# EAGLE board usblirc_v2 (EAGLE 5.02)
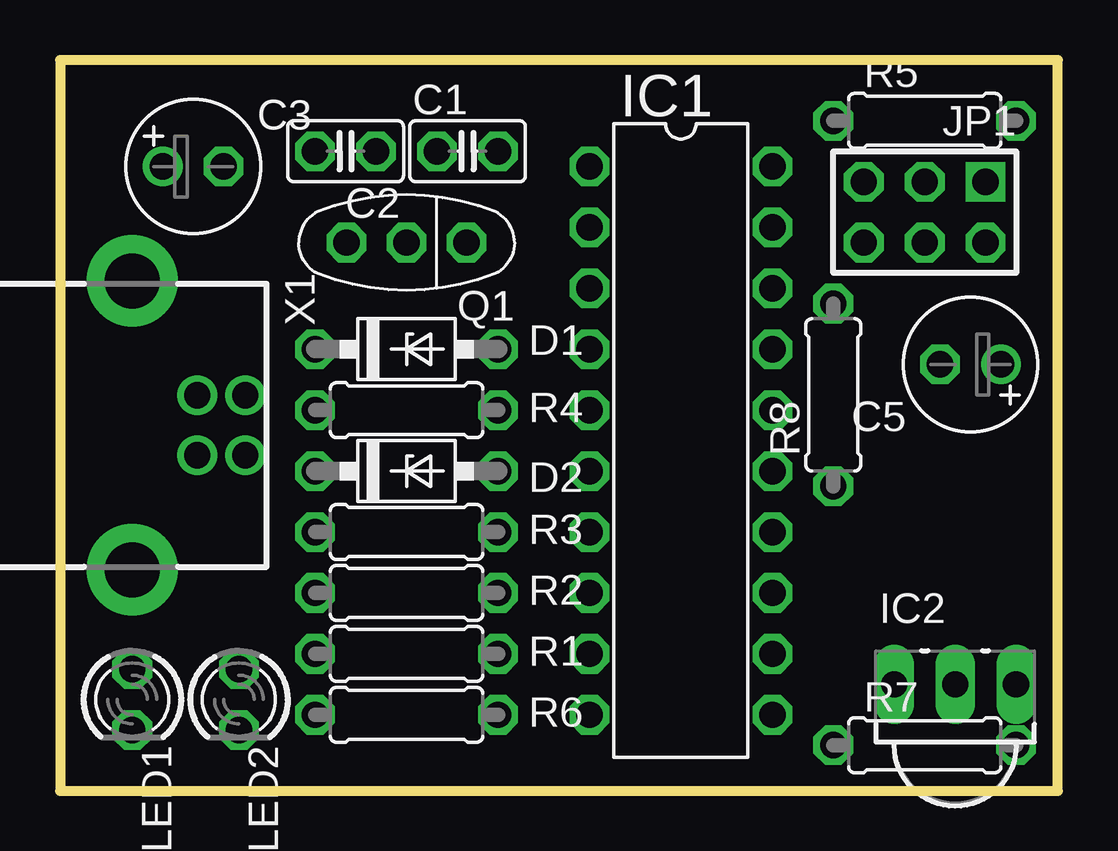
[diagram p0: board, top side]
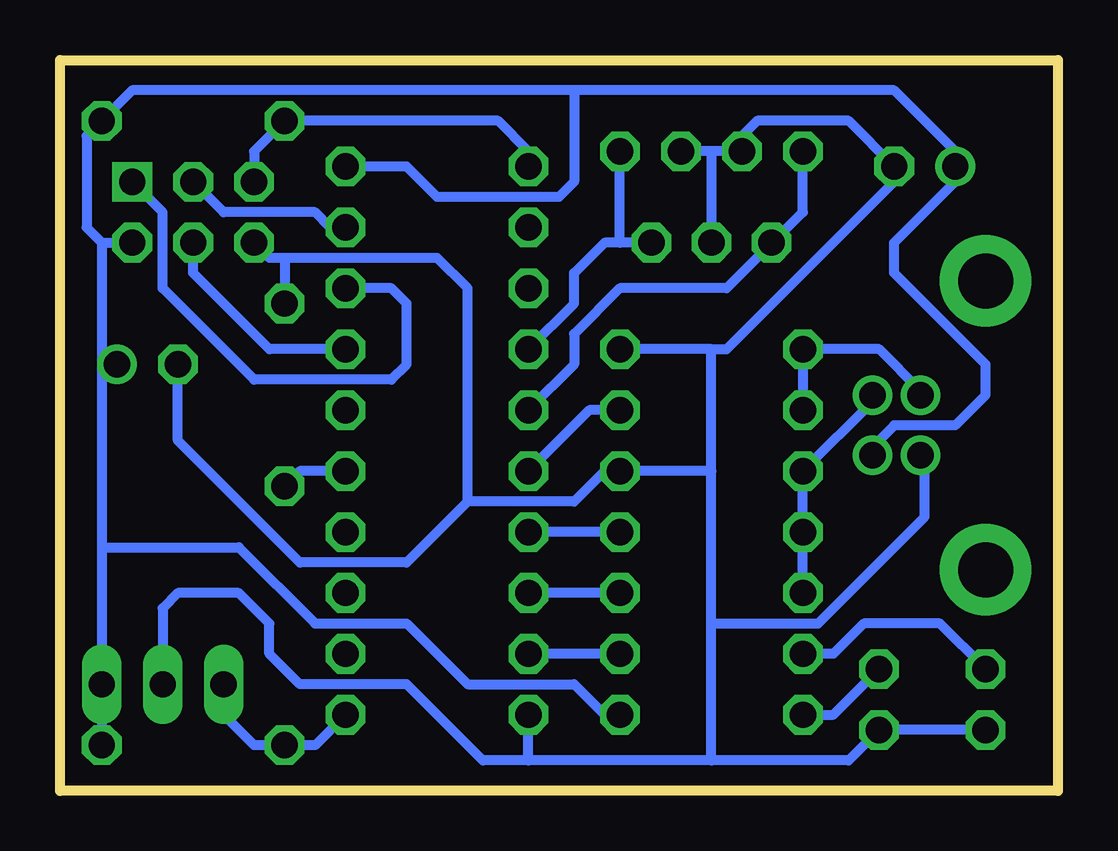
[diagram p1: board, bottom side, seen from below]

Size 41.58 x 30.47 mm. Coordinates in mm from the lower left corner, seen from the top.
Outline: 0,0 41.58,0 41.58,30.47 0,30.47 0,0
Copper layers (1*16): Top 0.035mm / dielectric 1.5mm / Bottom 0.035mm
Design rules "default": minimum track width 10mil, minimum drill 24mil, track to track 8mil, track to pad 8mil, pad to pad 8mil, via to via 8mil, smd to smd 8mil, copper to edge 40mil, drill to drill 8mil, minimum pad ring 10mil, minimum via ring 8mil, stop-mask expansion 4mil, vias tented up to drill 0mil, thermal gap 10mil

## Footprints (pad centres in the part's own frame; a part is rotated, then mirrored left to right if it is on the bottom)
C025-025X050 = drill 1.1 octagon: 1 -1.27,0; 2 1.27,0
E2,5-6 = drill 1.1 round: + -1.27,0 | drill 1.1 pad 1.6 octagon: - 1.27,0
DO41Z10 = drill 1.1 octagon: A 3.81,0; C -3.81,0
DIL20 = drill 1.1 octagon: 1 -11.43,-3.81; 2 -8.89,-3.81; 3 -6.35,-3.81; 4 -3.81,-3.81; 5 -1.27,-3.81; 6 1.27,-3.81; 7 3.81,-3.81; 8 6.35,-3.81; 9 8.89,-3.81; 10 11.43,-3.81; 11 11.43,3.81; 12 8.89,3.81; 13 6.35,3.81; 14 3.81,3.81; 15 1.27,3.81; 16 -1.27,3.81; 17 -3.81,3.81; 18 -6.35,3.81; 19 -8.89,3.81; 20 -11.43,3.81
PHSC38 = drill 1.1 long: 1 -2.54,0; 2 0,0; 3 2.54,0
AVR-ISP-6 = drill 1.1 square: 1 -2.54,-1.27 | drill 1.1 octagon: 2 -2.54,1.27; 3 0,-1.27; 4 0,1.27; 5 2.54,-1.27; 6 2.54,1.27
LED3MM = drill 1.1 octagon: A -1.27,0; K 1.27,0
CSTLS_G9 = drill 1.1 octagon: 1 -2.5,0; 2 0,0; 3 2.5,0
0207/7 = drill 1.1 octagon: 1 -3.81,0; 2 3.81,0
USB-B = drill 1.1 round: 1 1.25,4.71; 2 -1.25,4.71; 3 -1.25,2.71; 4 1.25,2.71 | drill 2.3 pad 3.81 round: S1 -6.02,0; S2 6.02,0

## Placement (x,y rotation side)
C1  [C025-025X050]  16.98,26.67 0 top
C2  [C025-025X050]  11.9,26.67 180 top
C3  100uF  [E2,5-6]  5.55,26.03 0 top
C5  47uF  [E2,5-6]  37.94,17.78 180 top
D1  1N4728  [DO41Z10]  14.44,18.41 0 top
D2  1N4728  [DO41Z10]  14.44,13.33 0 top
IC1  AT90S2313P  [DIL20]  25.87,14.6 270 top
IC2  PHSC38  [PHSC38]  37.3,4.44 0 top
JP1  AVR-ISP-6  [AVR-ISP-6]  36.03,24.12 180 top
LED1  [LED3MM]  3.01,3.81 270 top
LED2  [LED3MM]  7.46,3.81 270 top
Q1  [CSTLS_G9]  14.44,22.86 180 top
R1  1k  [0207/7]  14.44,5.71 180 top
R2  68  [0207/7]  14.44,8.25 180 top
R3  1k5  [0207/7]  14.44,10.79 180 top
R4  68  [0207/7]  14.44,15.87 180 top
R5  10k  [0207/7]  36.03,27.94 0 top
R6  1k  [0207/7]  14.44,3.17 0 top
R7  10k  [0207/7]  36.03,1.9 0 top
R8  22k  [0207/7]  32.22,16.51 90 top
X1  USB-BB  [USB-B]  3.01,15.23 270 top

## Library data of the parts
C1-C3 C5 D1 D2 IC1 IC2 JP1 LED1 LED2 Q1 R1-R8 X1 = USBtiny-Lirc

## Nets
+5V: C3.+ C5.+ IC1.20 IC2.3 JP1.2 R5.2 R6.2 R7.2 X1.1
GND: C1.1 C2.1 C3.- C5.- D1.A D2.A IC1.10 IC2.2 JP1.6 LED1.K LED2.K Q1.2 R8.2 X1.4
N$1: IC1.9 R1.1
N$2: LED1.A R1.2
N$3: C1.2 IC1.4 Q1.1
N$4: C2.2 IC1.5 Q1.3
N$5: IC1.19 JP1.3
N$6: D2.C R2.2 R3.2 X1.2
N$7: IC1.8 R2.1
N$8: IC1.7 R3.1
N$9: D1.C R4.2 X1.3
N$10: IC1.6 R4.1
N$11: IC1.18 JP1.1
N$12: IC1.1 JP1.5 R5.1
N$13: IC1.17 JP1.4
N$14: LED2.A R6.1
N$17: IC1.11 IC2.1 R7.1
N$21: IC1.15 R8.1

## Tracks (layer width: path | path; a pad name or v marks a point on that pad's centre or on a via)
+5V
  Bottom 0.406: 20.15,29.21 38.57,29.21 R5.2 40.48,27.3 40.48,23.49 39.84,22.86 | 20.15,29.21 6.82,29.21 4.28,26.67 C3.+ 4.28,25.39 6.82,22.86 6.82,21.59 3.01,17.78 3.01,16.51 4.28,15.23 6.82,15.23 7.72,14.33 X1.1 | IC1.20 27.14,26.03 25.87,24.76 20.79,24.76 20.15,25.39 20.15,29.21 | R7.2 IC2.3 39.84,10.15 | 39.84,22.86 JP1.2 | 39.84,22.86 39.84,17.78 | 39.84,17.78 39.84,10.15 | 39.84,17.78 C5.+ | 39.84,10.15 34.12,10.15 30.95,6.98 27.14,6.98 24.6,4.44 20.15,4.44 18.88,3.17 R6.2
GND
  Bottom 0.406: 14.44,26.67 C1.1 | 14.44,6.98 9.99,6.98 5.55,11.42 5.55,13.96 5.57,13.98 X1.4 | 14.44,6.98 14.44,13.33 | 14.44,13.33 D2.A 18.88,13.33 20.15,12.06 24.6,12.06 | 14.44,13.33 14.44,18.41 | 14.44,18.41 D1.A | 14.44,18.41 13.8,18.41 6.82,25.39 C3.- 8.72,27.94 12.54,27.94 13.17,27.3 C2.1 14.44,26.67 | 14.44,26.67 Q1.2 | 24.6,12.06 24.6,20.95 25.87,22.22 32.22,22.22 | 24.6,12.06 27.14,9.52 31.58,9.52 36.67,14.6 C5.- | LED1.K LED2.K 8.72,1.27 14.44,1.27 | 14.44,1.27 14.44,6.98 | 14.44,1.27 22.06,1.27 | 22.06,1.27 IC1.10 | 22.06,1.27 23.96,1.27 27.14,4.44 31.58,4.44 32.86,5.71 32.86,6.98 34.12,8.25 36.67,8.25 37.3,7.62 IC2.2 | 32.22,22.22 32.86,22.22 JP1.6 | 32.22,22.22 R8.2
N$1
  Bottom 0.406: R1.1 IC1.9
N$2
  Bottom 0.406: LED1.A 4.92,6.98 8.09,6.98 9.36,5.71 R1.2
N$3
  Bottom 0.406: Q1.1 18.25,22.86 | 18.25,22.86 18.88,22.86 20.15,21.59 20.15,20.32 IC1.4 | 18.25,22.86 C1.2
N$4
  Bottom 0.406: 11.9,22.86 13.8,20.95 18.25,20.95 20.15,19.05 20.15,17.78 IC1.5 | 11.9,22.86 Q1.3 | C2.2 10.63,24.12 11.9,22.86
N$5
  Bottom 0.406: IC1.19 30.31,23.49 30.95,24.12 34.76,24.12 JP1.3
N$6
  Bottom 0.406: R2.2 R3.2 D2.C 7.72,16.24 X1.2
N$7
  Bottom 0.406: R2.1 IC1.8
N$8
  Bottom 0.406: R3.1 IC1.7
N$9
  Bottom 0.406: R4.2 D1.C 7.46,18.41 5.72,16.68 X1.3
N$10
  Bottom 0.406: R4.1 19.52,15.87 IC1.6
N$11
  Bottom 0.406: JP1.1 37.3,24.12 37.3,20.95 33.49,17.14 27.77,17.14 27.14,17.78 27.14,20.32 27.77,20.95 IC1.18
N$12
  Bottom 0.406: IC1.1 22.06,26.67 23.33,27.94 R5.1 33.49,26.67 JP1.5
N$13
  Bottom 0.406: IC1.17 32.86,18.41 36.03,21.59 JP1.4
N$14
  Bottom 0.406: LED2.A 9.36,3.17 R6.1
N$17
  Bottom 0.406: IC1.11 30.95,1.9 R7.1 33.49,1.9 34.76,3.17 IC2.1
N$21
  Bottom 0.406: IC1.15 31.58,13.33 R8.1